# Altium PCB PCB.PcbDoc
Units mm, origin at the board's own origin, x right, y up, seen from the top; angles counter-clockwise.
Board outline 142.25 x 141.65 mm, 2 copper layers (Top Layer, Bottom Layer); 29 components, 51 nets, 181 pads, 0 vias.
Unrouted connection lines stored in the file: 3.
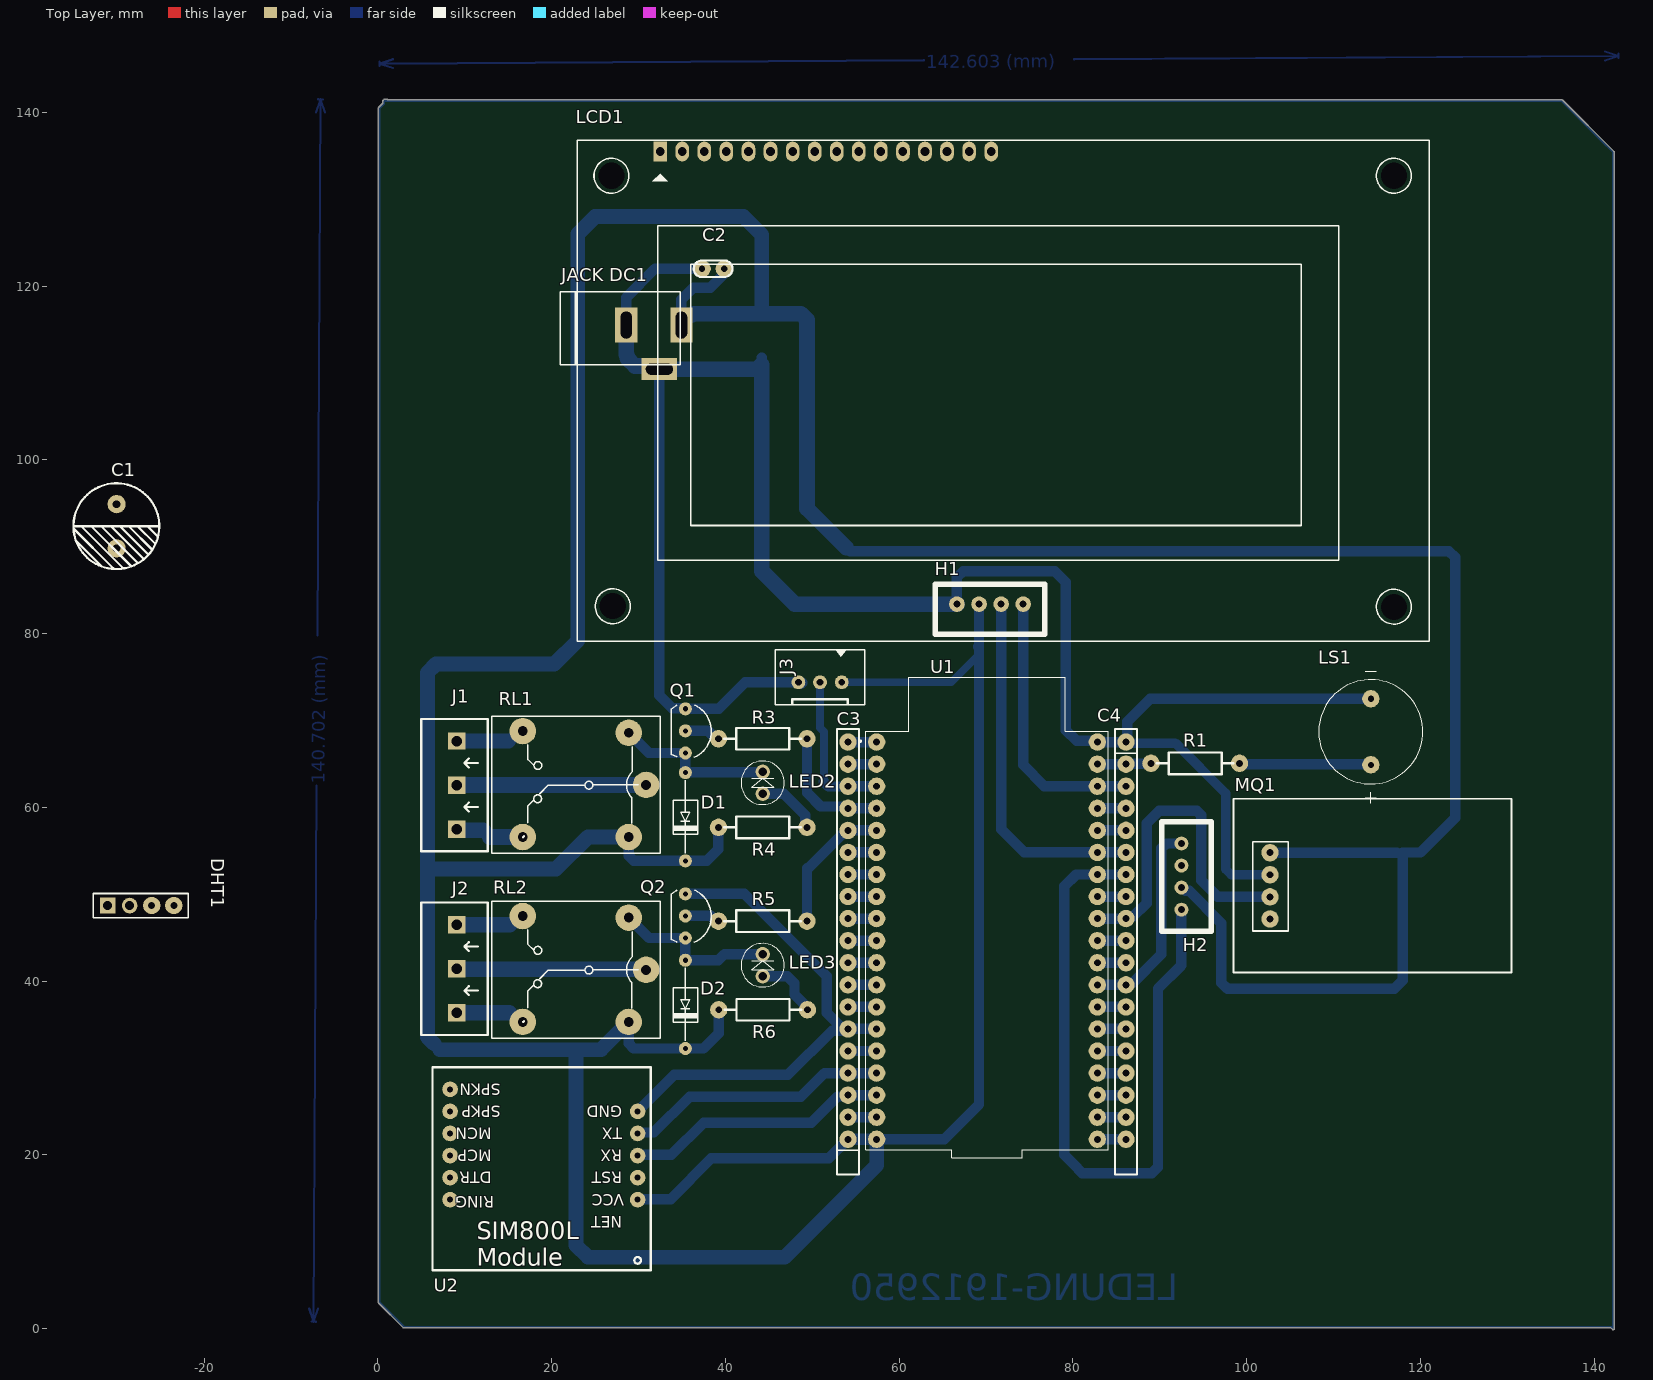
[diagram p0: Top Layer view]
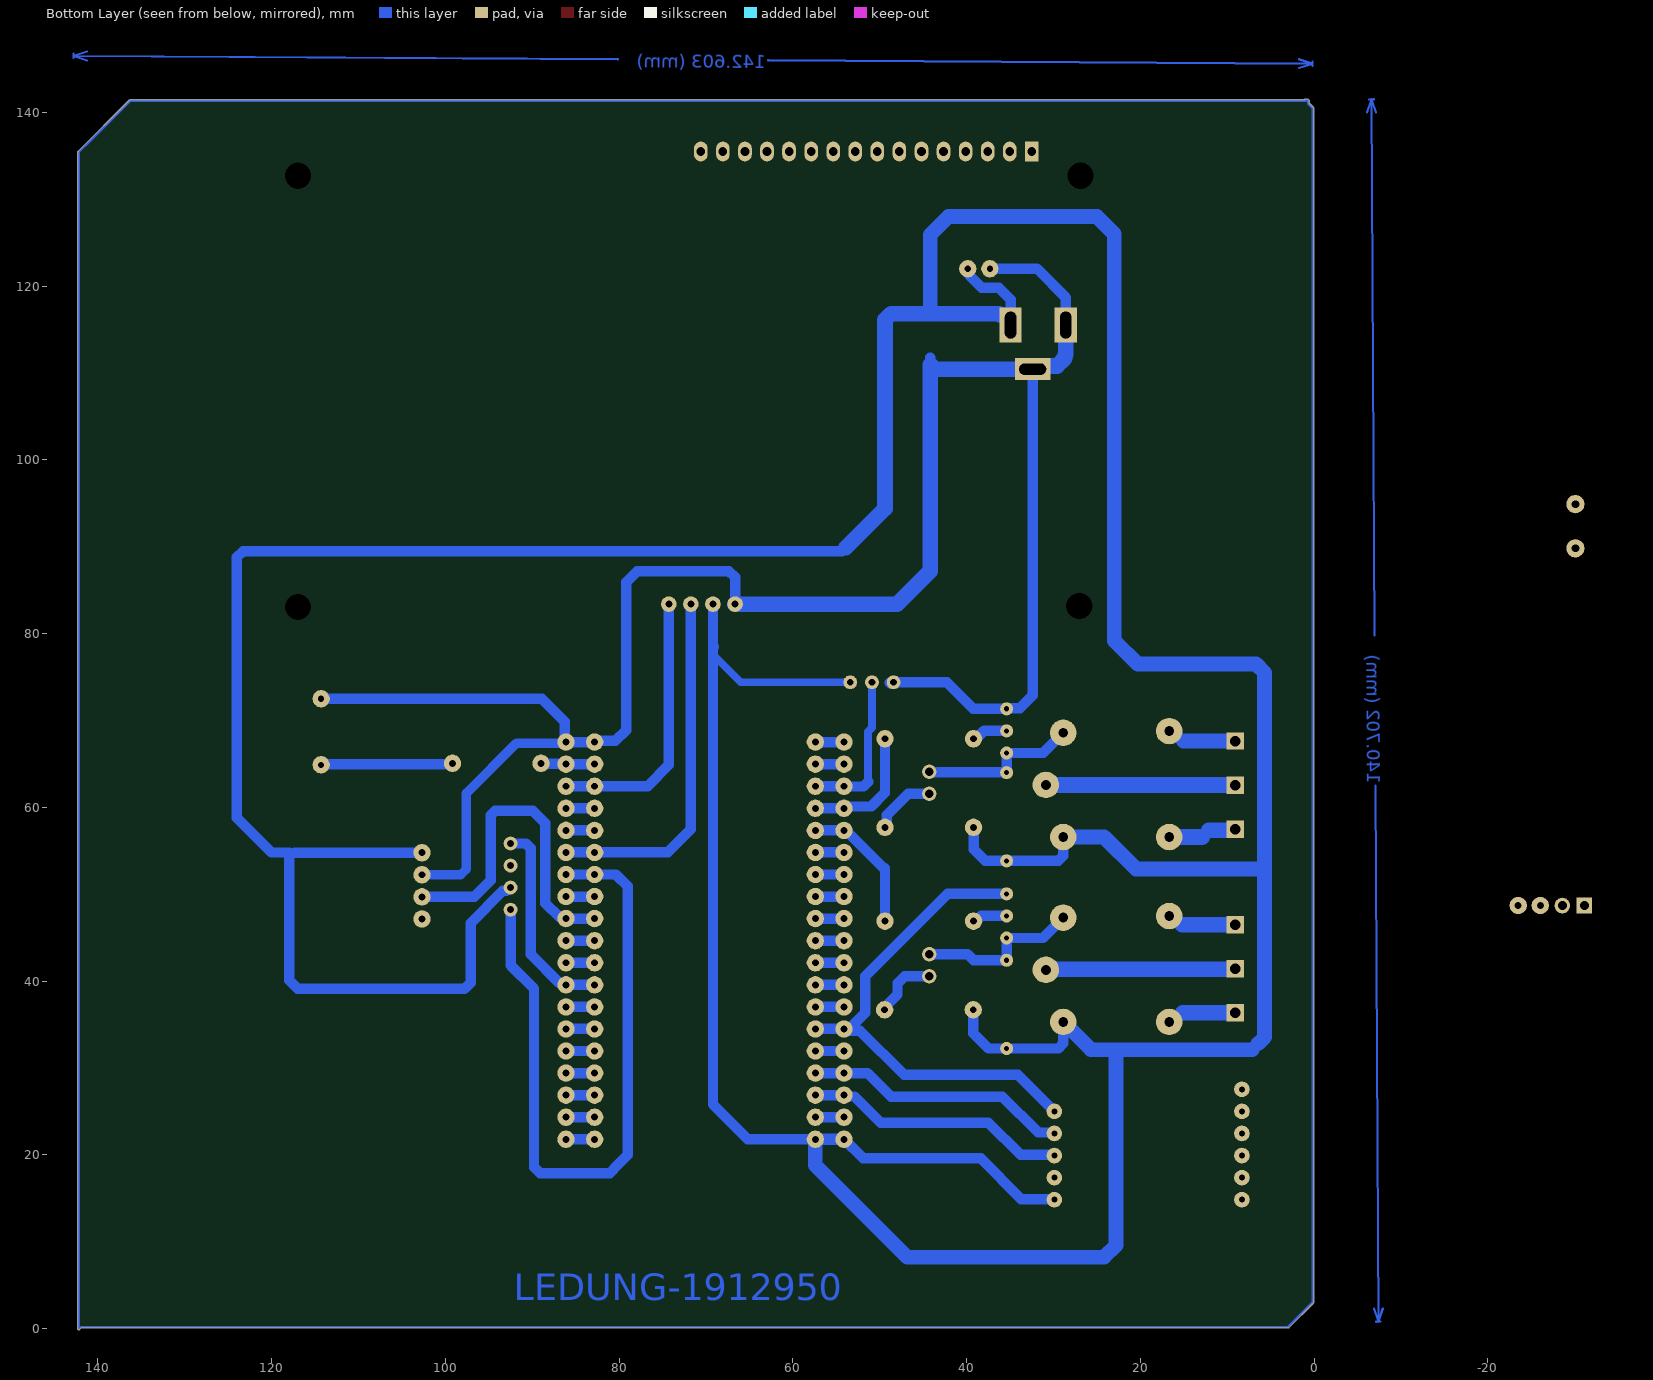
[diagram p1: Bottom Layer view, seen from below]
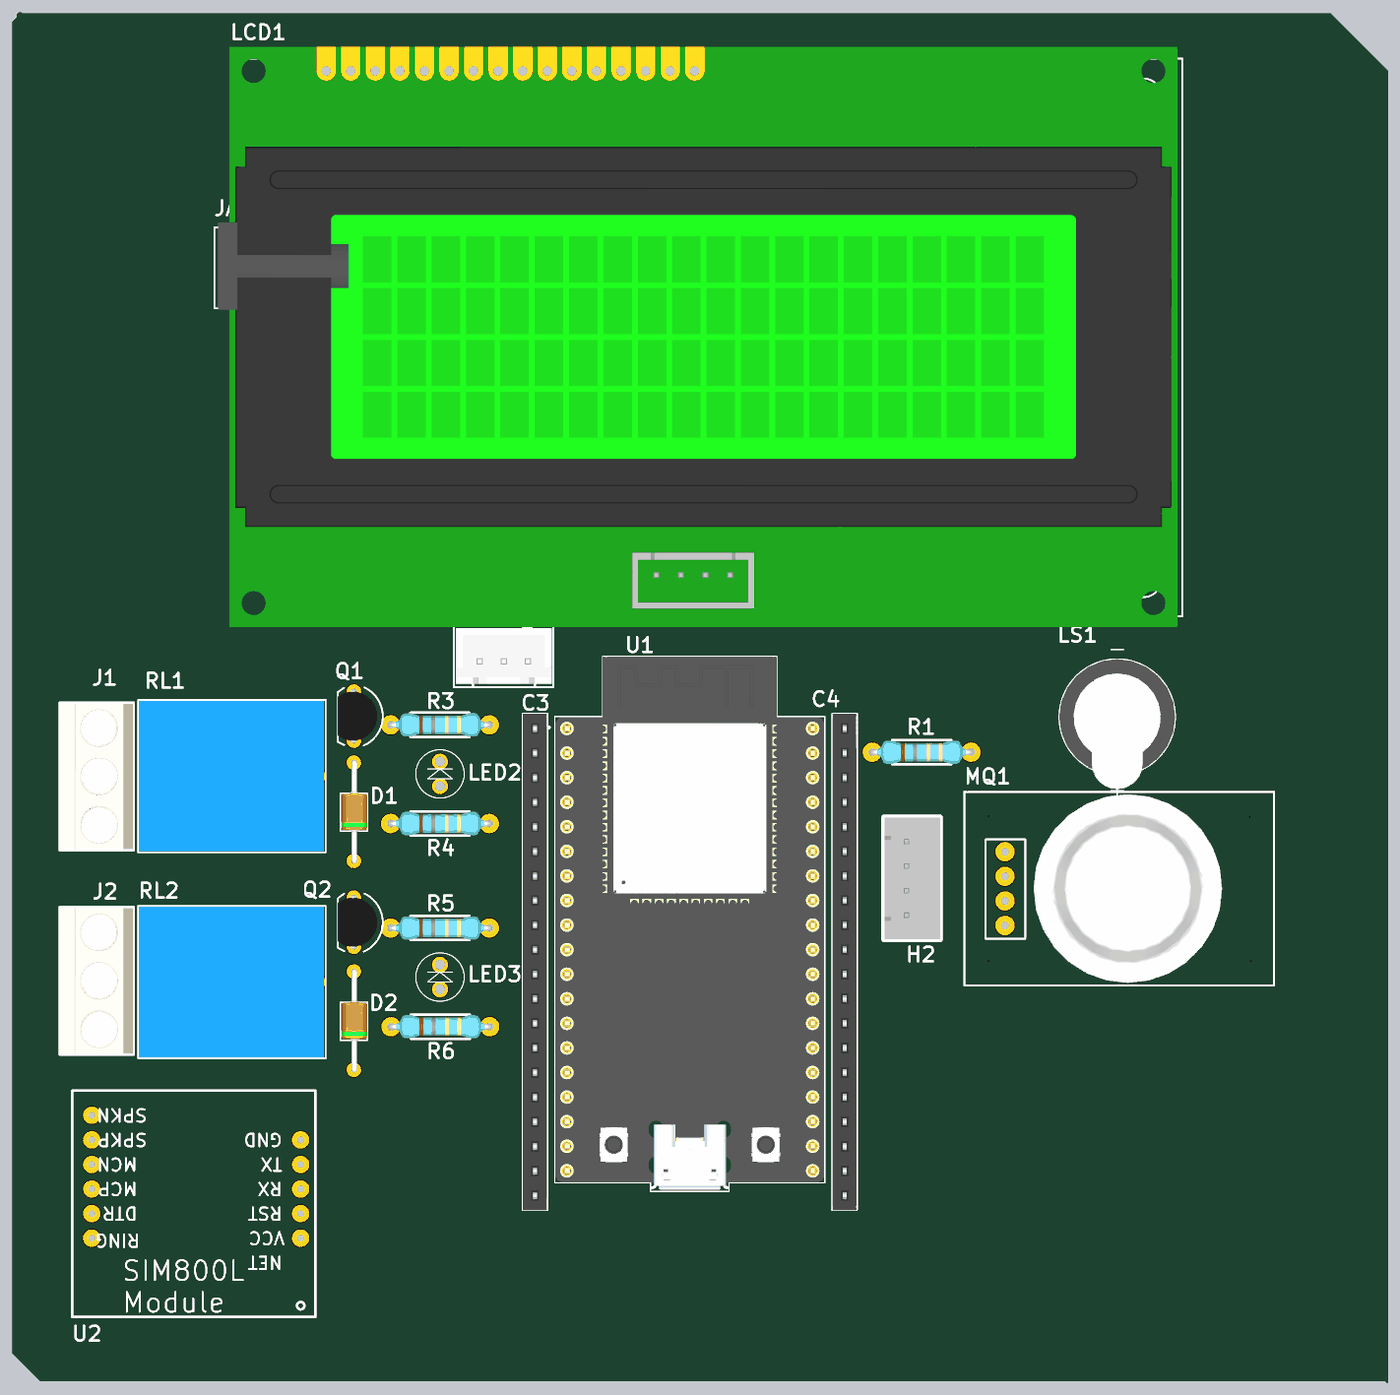
[diagram p2: 3D render of the assembled board from above, using the file's embedded part models]

## Layer stack, top to bottom
Top Solder: solder mask 0.0102, Solder Resist, Dk 3.5
Top Layer: signal copper 0.0356
Dielectric 1: dielectric 0.32, FR-4, Dk 4.8
Bottom Layer: signal copper 0.0356
Bottom Solder: solder mask 0.0102, Solder Resist, Dk 3.5

## Board outline
0.11,2.91 cw(c0.2,3) 0.073,3 0.073,140.5 cw(c0.2,140.5) 0.11,140.591 0.573,141.053 0.573,141.3 cw(c0.7,141.3) 0.61,141.391 0.71,141.49 cw(c0.8,141.401) 0.8,141.527 1,141.527 cw(c1,141.4) 1.124,141.427 136.3,141.427 cw(c136.3,141.3) 136.39,141.39 142.29,135.49 cw(c142.201,135.4) 142.327,135.4 142.327,0 cw(c142.2,0) 142.109,-0.09 141.947,0.073 3,0.073 cw(c3,0.2) 2.909,0.11

## Design rules (kind name [scope] priority, off if disabled: settings)
Clearance [All] p1: gap=0.5 ignorepadtopadclearanceinfootprint=FALSE
PolygonConnect [All] p1: connectstyle=Relief reliefconductorwidth=0.254 reliefentries=4 polygonreliefangle="90 Angle" airgapwidth=0.254
RoutingVias [All] p1: holewidth=0.8 width=2 viastyle="Through Hole" minholewidth=0.6 minwidth=1.5 maxholewidth=1.5 maxwidth=2.5
SolderMaskExpansion [All] p1: expansion=0.102 istentingtop=FALSE
Width [All] p1: maxlimit=1.8 minlimit=0.9 preferedwidth=1.2
30 further rules are at their usual default settings.

## Components (designator, comment, footprint, x,y, rotation, side; value= is the part's Value field where it differs from the comment)
C1 "1000uF" "tu hoa 10mm" -30.073,92.36 r270 top
C2 "104" "tu gom" 38.6,122 r0 top
C3 "JP20" JP20-C1T#1 54.118,19.252 r90 top
C4 "JP20" JP20-C1T#2 86.122,67.512 r270 top
D1 "Diode" DIO-1A 35.4,64 r270 top value=1N5007
D2 "Diode" DIO-1A 35.4,42.4 r270 top value=1N5007
DHT1 "DHT22" DHT22 -27.301,48.7 r0 top
H1 "Header 4P 2.54" XH2.54M-4#1 74.28,83.4 r180 top
H2 "Header 4P 2.54 Duc Thang" XH2.54M-4#2 92.5,55.84 r270 top
J1 "KF3" KF3-5.08 9.06,57.487 r90 top
J2 "KF3" KF3-5.08 9.06,36.353 r90 top
J3 "" CON3_100_B3B-XH-A_TH_ST 46,77.9 r270 top
"JACK DC1" "JACK DC 5.5" "JACK DC 5.5" 31.766,112.978 r0 top value="Jac DC"
LCD1 "LCD 20x4" LCD20X4A 32.5,135.5 r0 top value="LCD 20x4A"
LED2 "LED" LED-5MM-RED 44.3,61.56 r90 top value="LED 3 ly Single Colour"
LED3 "LED" LED-5MM-RED 44.3,40.56 r90 top value="LED 3 ly Single Colour"
LS1 "AI-1223-TWT-5V-R" XDCR_AI-1223-TWT-5V-R 114.3,68.7 r180 top
MQ1 "MQ-135" MQ-135 100.8,58.38 r0 top
Q1 "2N3904" TO92-123 35.4,68.8 r270 top value=C1815
Q2 "2N3904" TO92-123 35.4,47.5 r270 top value=C1815
R1 "100" "tro vach 1/4w" 94.088,65.072 r180 top
R3 "4.7K" "tro vach 1/4w" 44.3,67.9 r180 top
R4 "330" "tro vach 1/4w" 44.3,57.7 r180 top
R5 "4.7K" "tro vach 1/4w" 44.3,46.9 r180 top
R6 "330" "tro vach 1/4w" 44.339,36.7 r180 top
RL1 "Relay" "Relay 5 Chan SRD" 30.88,62.585 r180 top
RL2 "Relay" "Relay 5 Chan SRD" 30.88,41.3 r180 top
U1 "ESP32-DEVKITC" MODULE_ESP32-DEVKITC 70.12,44.662 r0 top
U2 "SIM800L" "SIM800L MODULE" 29.9,25 r180 top

## Footprints (in the part's own frame and the unit in brackets; to place one, negate y for a bottom-side part, rotate by r counter-clockwise, add the part's x,y. Pads: shape width x height; smd on the part's side, far side on the other; paste and mask are expansions set on the pad)
CON3_100_B3B-XH-A_TH_ST [mm] "Connector Header"
  round 1.6 hole 0.8: 1(3.5,7.4) 2(3.5,4.9) 3(3.5,2.4)
  silkscreen extent -0.25,-0.25 6.1,10.03, body extent 0.02,-0.05 5.78,9.85, height 7.01
DHT22 [mm]
  rect 1.8x1.8 hole 1.02: 1(-3.81,0)
  round 1.8 hole 1.02: 2(-1.27,0)
  round 2 hole 0.8: 3(1.27,0) 4(3.81,0)
  silkscreen extent -5.46,-1.4 5.46,1.4, body extent -7.86,-5.84 7.61,2.31, height 35.57
DIO-1A [mm]
  round 1.5 hole 0.6: 1(0,0) 2(10.16,0)
  silkscreen extent 0.89,-1.4 9.27,1.4, body extent -0.28,-1.27 10.44,1.38, height 2.6
"JACK DC 5.5" [mm] "Jac DC input"
  rect 2.54x4.064 hole 1.3 slot 3.1 at 90 deg: 1(3.175,2.54) 2(-3.175,2.54)
  rect 4.064x2.54 hole 1.3 slot 3.1 at 0 deg: 3(0.635,-2.54)
  silkscreen extent -10.79,-2.03 3.05,6.35, body extent -10.42,-2.67 3.4,6.84, height 11.02
JP20-C1T#1 [mm] "20 row, straight, gold plating"
  round 0 all layers, no hole: 1(0,0)
  round 2 hole 0.8: 2(2.54,0) 3(5.08,0) 4(7.62,0) 5(10.16,0) 6(12.7,0) 7(15.24,0) 8(17.78,0) 9(20.32,0) 10(22.86,0) 11(25.4,0) 12(27.94,0) 13(30.48,0) 14(33.02,0) 15(35.56,0) 16(38.1,0) 17(40.64,0) 18(43.18,0) 19(45.72,0) 20(48.26,0)
  silkscreen extent -1.52,-1.27 49.78,1.27, body extent -1.52,-1.25 49.78,1.25, height 8.51
JP20-C1T#2 [mm] "20 row, straight, gold plating"
  round 2 hole 0.8: 1(0,0) 2(2.54,0) 3(5.08,0) 4(7.62,0) 5(10.16,0) 6(12.7,0) 7(15.24,0) 8(17.78,0) 9(20.32,0) 10(22.86,0) 11(25.4,0) 12(27.94,0) 13(30.48,0) 14(33.02,0) 15(35.56,0) 16(38.1,0) 17(40.64,0) 18(43.18,0) 19(45.72,0)
  round 0 all layers, no hole: 20(48.26,0)
  silkscreen extent -1.52,-1.27 49.78,1.27, body extent -1.52,-1.25 49.78,1.25, height 8.51
KF3-5.08 [mm]
  rect 2x2 hole 1.2: 1(0,0) 2(5.08,0) 3(10.147,0)
  silkscreen extent -2.54,-3.58 12.7,4.06, body extent -2.42,-3.51 12.58,3.99, height 10
LCD20X4A [mil] "LCD dipslay 20x4, 16 pin"
  rect 62x90 hole 39: 1(0,0)
  oval 62x90 hole 39: 2(100,0) 3(200,0) 4(300,0) 5(400,0) 6(500,0) 7(600,0) 8(700,0) 9(800,0) 10(900,0) 11(1000,0) 12(1100,0) 13(1200,0) 14(1300,0) 15(1400,0) 16(1500,0)
  round 102.36 hole 118.11: "Hole 0"(-220,-110) "Hole 0"(-215,-2060) "Hole 0"(3325,-2065) "Hole 0"(3325,-110)
  silkscreen extent -375,-2220 3485,50, body extent -392,-2264 3466,98, height 417
LED-5MM-RED [mil]
  round 65 hole 40: 1(0,0) 2(100,0)
  silkscreen extent -48,-98 148,98, body extent -54,-105 155,105, height 370
MODULE_ESP32-DEVKITC [mm]
  round 2 hole 0.8: 1(-12.7,22.85) 2(-12.7,20.31) 3(-12.7,17.77) 4(-12.7,15.23) 5(-12.7,12.69) 6(-12.7,10.15) 7(-12.7,7.61) 8(-12.7,5.07) 9(-12.7,2.53) 10(-12.7,-0.01) 11(-12.7,-2.55) 12(-12.7,-5.09) 13(-12.7,-7.63) 14(-12.7,-10.17) 15(-12.7,-12.71) 16(-12.7,-15.25) 17(-12.7,-17.79) 18(-12.7,-20.33) 19(-12.7,-22.87) 20(12.7,-22.87) 21(12.7,-20.33) 22(12.7,-17.79) 23(12.7,-15.25) 24(12.7,-12.71) 25(12.7,-10.17) 26(12.7,-7.63) 27(12.7,-5.09) 28(12.7,-2.55) 29(12.7,-0.01) 30(12.7,2.53) 31(12.7,5.07) 32(12.7,7.61) 33(12.7,10.15) 34(12.7,12.69) 35(12.7,15.23) 36(12.7,17.77) 37(12.7,20.31) 38(12.7,22.85)
  silkscreen extent -14.67,-25 13.95,30.3, body extent -13.97,-24.8 13.97,30.3, height 3.25
MQ-135 [mm]
  round 0 all layers, no hole: 0(0.2,-14.9) 0(0.2,0.1) 0(27.2,0) 0(27.3,-14.9)
  round 2 hole 0.8: 1(1.9,-3.6) 2(1.9,-6.14) 3(1.9,-8.68) 4(1.9,-11.22)
  silkscreen extent -2.3,-17.4 29.7,2.6, body extent 4.85,-17.15 24.35,2.35, height 14
"Relay 5 Chan SRD" [mil] "Relay SPDT, 5 pin, 10A,W 650mil, L 800mil, H 800mil"
  round 120 hole 45: 1(0,0) 2(559.06,236.22) 3(559.06,-243.78) 4(78.74,-236.22) 5(78.74,236.22)
  silkscreen extent -63,-311 700,310, body extent -55,-306 697,304, height 602
"SIM800L MODULE" [mm]
  round 1.8 hole 0.7: 1(0,10.16) 2(0,7.62) 3(0,5.08) 4(0,2.54) 5(0,0) 6(21.59,10.16) 7(21.59,7.62) 8(21.59,5.08) 9(21.59,2.54) 10(21.59,0) 11(21.59,-2.54)
  silkscreen extent -1.52,-5.08 23.62,18.29
TO92-123 [mm] "TO-92"
  round 1.5 hole 0.6: 1(-2.54,0) 2(0,0) 3(2.54,0)
  silkscreen extent -2.96,-1.65 3.05,2.99, body extent -2.77,-1.67 2.77,2.41, height 6.22
"tro vach 1/4w" [mm]
  round 2 hole 0.8: 1(-5.1,0) 2(5.1,0)
  silkscreen extent -4.39,-1.25 4.42,1.25, body extent -5.38,-1.2 5.38,1.2, height 2.41
"tu gom" [mm] "Tu gom mini"
  round 2 hole 0.7: 1(-1.27,0) 2(1.27,0)
  silkscreen extent -2.25,-0.97 2.22,0.97, body extent -2.92,-0.85 2.92,0.85, height 6.12
"tu hoa 10mm" [mm]
  round 2.1 hole 0.9: 1(-2.54,0) 2(2.54,0)
  silkscreen extent -4.95,-4.96 4.93,4.92, body extent -5,-5 4.97,5, height 20.01
XDCR_AI-1223-TWT-5V-R [mm]
  round 2 hole 0.7: N(0,-3.8) P(0,3.8)
  silkscreen extent -6,-6.98 6,8.25, body extent -6,-6 6,7.44, height 9.7
XH2.54M-4#1 [mm]
  round 1.8 hole 0.8: 1(0,0) 2(2.54,0) 3(5.08,0) 4(7.62,0)
  silkscreen extent -2.48,-2.26 10.1,3.46, body extent -2.48,-2.26 10.1,3.48, height 6.91
XH2.54M-4#2 [mm]
  round 1.6 hole 0.8: 1(0,0) 2(2.54,0) 3(5.08,0) 4(7.62,0)
  silkscreen extent -2.48,-2.26 10.1,3.46, body extent -2.48,-2.26 10.1,3.48, height 6.91

## Part data
C1: library part "Tu Hoa 1000uF 10V 10x12", "Cắm", Chung_Loai=Cắm, Don_Vi=Con, Ma_Hang=MH006614, So_Chan=2, Ten_Linh_Kien="Tụ Hóa 1000uF 10V 10x12MM"
C2: library part "Tu gom 104 50V", "Cắm", Chung_Loai=Cắm, Don_Vi=Con, Ma_Hang=MH004761, So_Chan=2, Ten_Linh_Kien="Tụ gốm 104 100nF 50V"
C3 C4: "WR-PHD 2.54 mm Angled Socket Header", Manufacturer="W¨¹rth Elektronik eiSos GmbH", partNo=613020143121, ComponentLink1 Description=Manufacturer, ComponentLink1URL=http://www.we-online.com, ComponentLink2 Description=Datasheet, ComponentLink2URL=http://katalog.we-online.de/em/datasheet/6130xx143121.pdf, Created by="Karrer Zheng", Created Date="29 March 2013", NoPins=20
D1 D2: "Default Diode", Code - JEDEC=DO-214-AB, Published=8-Jun-2000, Publisher="Altium Limited", Revision="July-2002: Re-released for DXP Platform."
DHT1: Manufacturer="W¨¹rth Elektronik eiSos GmbH", partNo=613004143121, ComponentLink1 Description=Manufacturer, ComponentLink1URL=http://www.we-online.com, ComponentLink2 Description=Datasheet, ComponentLink2URL=http://katalog.we-online.de/em/datasheet/6130xx143121.pdf, Created by="Karrer Zheng", Created Date="29 March 2013", NoPins=04
H1: library part "Header 4P 2.54 Duc Thang", "Cắm", Chung_Loai=Cắm, Don_Vi=Con, Ma_Hang=MH001285, Ten_Linh_Kien="Header 4P XH2.54-4P Đực Thẳng"
H2: "Cắm", Chung_Loai=Cắm, Don_Vi=Con, Ma_Hang=MH001285, Ten_Linh_Kien="Header 4P XH2.54-4P Đực Thẳng"
J1 J2: Manufacturer="Würth Elektronik eiSos GmbH", partNo=691103110003, ComponentLink1 Description=Manufacturer, ComponentLink1URL=http://www.we-online.com, ComponentLink2 Description=Datasheet, ComponentLink2URL=http://katalog.we-online.de/em/datasheet/6911031100xx.pdf, Created by="Karrer Zheng", Created Date="29 October 2013", NoPins=3
J3: library part CON-PLG_3X1-100-ST-TH, "3 Pins, 1 Row 2.54mm Pitch, straight Connector, male", Alternate Part Number-1=NA, Case/Package=TH-CON, Crimp Part Number=ASXHSXH22K51, Manufacturer=CUI, Manufacturer Part Number=B3B-XH-A(LF)(SN), Mating Part Number=XHP-3, Supplier Part Number-1=B3B-XH-A(LF)(SN), Supplier-1=ARROW
LCD1: library part LCD20x4A, "LCD dipslay 20 char, 4 line"
LED2 LED3: "LED Single colour Green and Red"
LS1 U1: Package=None, Availability=Unavailable, Price=None
  LS1: MF="{'manufacturer': u'PUI Audio,'}", MP=AI-1223-TWT-5V-R
  U1: MF="{'manufacturer': u'Olimex LTD'}", MP=ESP32-DEVKITC
MQ1: "size: 32x20mm", WEB=TECHMT.VN
Q1 Q2: library part 2N904, "NPN 600mW, ECB"
R1 R3 R4 R5 R6: library part "Tro Vach 1/4W 1% 10k", "Cắm", Chung_Loai=Cắm, Don_Vi=Con, Ma_Hang=MH006349, So_Chan=2, Ten_Linh_Kien="Trở Vạch 1/4w 1% 10k"
RL1 RL2: library part "Relay 5 Chan SRD", "Relay 5 Chan", Ma_Hang=MH009374, Ten="Relay 5V10A SRD-05VDC-SL-C Chính Hãng"
U2: BOM_Supplier=Amazon, BOM_Supplier Part=B01DLIJM2E, Contributor=trigui, sourceId=ega4lDVPJ, spicePre=U, timeStamp=1475502242

## Nets (pads, with @x,y where several pads share a name; then routed paths per layer and width w, separated by ;. In a path a pad name is that pad's centre, name@x,y a point inside that pad or via, vN(x,y) a via of type N, cw(c..) or ccw(c..) an arc to the next point about the centre after c; other vN are vias at no path point)
5V: "JACK DC1.1" C1.1 C2.2 C3.2 D1.2 D2.2 H1.3 H2.3 J3.1 MQ1.1 R4.2 R6.2 RL1.5 RL2.5 U1.19 U2.1 | length 629.6
  Bottom Layer w0.9: J3.1 66,74.4 69,77.4 69.2,77.4
  Bottom Layer w1.2: 6.45,32.803 7.153,32.1 ; RL2.5 28.88,32.827 29.467,32.24 D2.2 37.473,32.24 39.239,34.007 R6.2 ; RL1.5 28.88,54.427 29.467,53.84 D1.2 37.873,53.84 39.2,55.167 R4.2 ; U2.1 29.96,14.9 33.7,14.9 38.4,19.6 51.926,19.6 C3.2 ; 34.941,115.518 34.941,116.28 34.941,118.441 36.29,119.79 38.245,119.79 39.66,121.204 39.66,121.79 C2.2 ; 53.9,89.9 54,89.9 54.4,89.5 123.297,89.5 124,88.797 124,58.8 120,54.8 118,54.8 118,40.1 117,39.1 97.803,39.1 97.1,39.803 97.1,46.675 93.395,50.38 92.988,50.38 92.608,50.76 H2.3 ; U1.19 65.192,21.792 69.2,25.8 69.2,77.4 69.2,78.5 ; 69.1,78.5 69.2,78.5 ; H1.3 69.2,78.5 ; MQ1.1 117.297,54.78
  Bottom Layer w1.3: C3.2 U1.19
  Bottom Layer w1.7: 6.45,32.803 5.7,33.553 5.7,75.504 6.696,76.5 20.3,76.5 23,79.2 23,126 25,128 42.1,128 44.2,125.9 44.2,116.84 ; 6.45,52.9 20.5,52.9 24.185,56.585 RL1.5 ; 7.153,32.1 22.8,32.1 ; RL2.5 25.68,32.1 22.8,32.1 ; U1.19 57.42,18.803 46.817,8.2 24.2,8.2 22.8,9.6 22.8,32.1
  Bottom Layer w1.8: 34.941,116.28 35.311,116.65 36.073,116.65 36.263,116.84 44.2,116.84 48.697,116.84 49.4,116.137 49.4,94.4 53.9,89.9
BUZ: C4.2 R1.2 U1.37 | length 6.2
  Bottom Layer w1.2: U1.37 C4.2 86.172,65.022 88.938,65.022 R1.2
DHT: C3.18 J3.2 U1.3 | length 18
  Bottom Layer w0.9: J3.2 50.9,69.158 51.35,68.708 51.35,62.927
  Bottom Layer w1.2: 51.35,62.927 51.877,62.4 54.086,62.4 C3.18 U1.3
DMQ135: C4.9 MQ1.3 U1.30 | length 38.9
  Bottom Layer w1.2: U1.30 C4.9 86.332,47.403 86.918,47.403 88.5,48.985 88.5,58.173 89.927,59.6 94.273,59.6 94.8,59.073 94.8,51.6 96.7,49.7 MQ1.3
GND: "JACK DC1.2" "JACK DC1.3" C1.2 C2.1 C4.1 H1.4 J3.3 LS1.N MQ1.2 Q1.1 U1.38 | length 238.1
  Bottom Layer w1.1: C4.1@86.234,67.4 91.8,67.4 97.6,61.6 97.6,52.88 98.24,52.24 MQ1.2
  Bottom Layer w1.2: 28.591,115.518 28.591,118.691 31.9,122 C2.1 ; 32.401,110.438 32.401,72.903 33.907,71.397 35.343,71.397 Q1.1 39.24,71.34 42.3,74.4 J3.3 ; 44.2,110.954 44.2,111.76 ; J3.3@48.7,74.2 J3.3@48.834,74.334 ; H1.4 66.66,86.497 67.363,87.2 77.9,87.2 79.2,85.9 79.2,68.9 80.435,67.665 82.667,67.665 U1.38 C4.1 ; C4.1@86.234,67.4 C4.1 ; LS1.N 88.9,72.5 86.262,69.862 86.262,67.653 C4.1
  Bottom Layer w1.8: 28.591,115.518 28.6,115.509 28.6,112.1 28.7,112 28.7,111.7 29.592,110.808 32.031,110.808 32.401,110.438 43.684,110.438 44.2,110.954 44.2,87.2 48,83.4 H1.4
NC1: C3.7 Q2.1 U1.14 U2.5 | length 59.1
  Bottom Layer w1.2: U2.5 34.1,29.2 47.2,29.2 52.282,34.282 53.908,34.282 C3.7 ; Q2.1 42.16,50.04 51.649,40.551 51.649,36.375 53.322,34.702 53.908,34.702 C3.7 ; U1.14 C3.7
NC2: C4.7 H2.4 U1.32 | length 81.7
  Bottom Layer w1.2: C4.7@86.332,52.483 C4.7 U1.32 80.372,52.272 79,50.9 79,20 80.05,18.95 81.1,17.9 83.889,17.9 83.897,17.892 89.097,17.892 89.8,18.595 89.8,39.097 92.5,41.797 H2.4 H2.4@92.423,48.143
NetC3_3: C3.3 U1.18 | length 3.3
  Bottom Layer w1.2: C3.3 U1.18
NetC3_6: C3.6 U1.15 | length 3.3
  Bottom Layer w1.2: C3.6 U1.15
NetC3_8: C3.8 U1.13 | length 3.3
  Bottom Layer w1.2: C3.8 U1.13
NetC3_9: C3.9 U1.12 | length 3.3
  Bottom Layer w1.2: C3.9 U1.12
NetC3_10: C3.10 U1.11 | length 3.3
  Bottom Layer w1.2: C3.10 U1.11
NetC3_11: C3.11 U1.10 | length 3.3
  Bottom Layer w1.2: C3.11 U1.10
NetC3_12: C3.12 U1.9 | length 3.3
  Bottom Layer w1.2: C3.12 U1.9
NetC3_13: C3.13 U1.8 | length 3.3
  Bottom Layer w1.2: C3.13 U1.8
NetC3_14: C3.14 U1.7 | length 3.3
  Bottom Layer w1.2: C3.14 U1.7
NetC3_15: C3.15 U1.6 | length 3.3
  Bottom Layer w1.2: C3.15 U1.6
NetC3_19: C3.19 U1.2 | length 3.3
  Bottom Layer w1.2: C3.19 U1.2
NetC3_20: C3.20 U1.1 | length 3.3
  Bottom Layer w1.2: C3.20 U1.1
NetC4_4: C4.4 U1.35 | length 3.3
  Bottom Layer w1.2: U1.35 C4.4
NetC4_5: C4.5 U1.34 | length 3.3
  Bottom Layer w1.2: U1.34 C4.5
NetC4_8: C4.8 U1.31 | length 3.6
  Bottom Layer w1.2: U1.31 C4.8 C4.8@86.332,49.943
NetC4_10: C4.10 U1.29 | length 3.3
  Bottom Layer w1.2: U1.29 C4.10
NetC4_11: C4.11 U1.28
NetC4_13: C4.13 U1.26 | length 3.3
  Bottom Layer w1.2: U1.26 C4.13
NetC4_14: C4.14 U1.25 | length 3.3
  Bottom Layer w1.2: U1.25 C4.14
NetC4_15: C4.15 U1.24 | length 3.3
  Bottom Layer w1.2: U1.24 C4.15
NetC4_16: C4.16 U1.23 | length 3.3
  Bottom Layer w1.2: U1.23 C4.16
NetC4_17: C4.17 U1.22 | length 3.3
  Bottom Layer w1.2: U1.22 C4.17
NetC4_18: C4.18 U1.21 | length 3.3
  Bottom Layer w1.2: U1.21 C4.18
NetC4_19: C4.19 U1.20 | length 3.3
  Bottom Layer w1.2: U1.20 C4.19
NetD1_1: D1.1 LED2.2 Q1.3 RL1.4 | length 18.7
  Bottom Layer w1.2: RL1.4 31.205,66.26 Q1.3 D1.1 35.45,64.05 44.25,64.05 LED2.2
NetD2_1: D2.1 LED3.2 Q2.3 RL2.4 | length 19.2
  Bottom Layer w1.2: RL2.4 31.22,44.96 Q2.3 D2.1 39.2,42.4 39.9,43.1 LED3.2
NetJ1_1: J1.1 RL1.2 | length 8
  Bottom Layer w1.2: J1.1 J1.1@9.178,57.369 ; 12.11,57.369 12.894,56.585
  Bottom Layer w1.8: J1.1@9.178,57.369 12.11,57.369 ; 12.894,56.585 RL1.2
NetJ1_2: J1.2 RL1.1 | length 21.8
  Bottom Layer w1.2: J1.2 J1.2@9.069,62.576 ; RL1.1@30.871,62.576 RL1.1
  Bottom Layer w1.8: J1.2@9.069,62.576 RL1.1@30.871,62.576
NetJ1_3: J1.3 RL1.3 | length 8.1
  Bottom Layer w1.2: 15.037,67.634 16.18,68.777 RL1.3
  Bottom Layer w1.7: J1.3 15.037,67.634
NetJ2_1: J2.1 RL2.2 | length 8.1
  Bottom Layer w1.2: 15.127,36.353 16.18,35.3 RL2.2
  Bottom Layer w1.8: J2.1 15.127,36.353
NetJ2_2: J2.2 RL2.1 | length 21.9
  Bottom Layer w1.2: J2.2 J2.2@9.126,41.366 ; RL2.1@30.814,41.366 RL2.1
  Bottom Layer w1.8: J2.2@9.126,41.366 RL2.1@30.814,41.366
NetJ2_3: J2.3 RL2.3 | length 8
  Bottom Layer w1.2: 15.188,46.5 16.18,47.492 RL2.3
  Bottom Layer w1.8: J2.3 15.188,46.5
NetLED2_1: LED2.1 R4.1 | length 7.4
  Bottom Layer w1.2: LED2.1 46.74,61.56 49.19,59.11 49.19,57.91 R4.1
NetLED3_1: LED3.1 R6.1 | length 7.7
  Bottom Layer w1.2: LED3.1 47.14,40.56 47.956,39.744 47.956,38.481 49.439,36.998 R6.1
NetLS1_P: LS1.P R1.1 | length 15.3
  Bottom Layer w1.2: R1.1@99.256,65.14 R1.1 99.274,64.986 114.214,64.986 LS1.P
NetQ1_2: Q1.2 R3.2 | length 4.2
  Bottom Layer w1.2: Q1.2 38.002,68.8 38.902,67.9 R3.2
NetQ2_2: Q2.2 R5.2 | length 4
  Bottom Layer w1.2: Q2.2 38.302,47.5 38.902,46.9 R5.2
RL1: C3.17 R3.1 U1.4 | length 15
  Bottom Layer w1.2: R3.1 49.4,61.7 51,60.1 53.91,60.1 C3.17 U1.4
RL2: C3.16 R5.1 U1.5 | length 15.9
  Bottom Layer w1.2: R5.1 49.4,53 49.548,53 53.9,57.352 C3.16 U1.5
RX1: C3.5 U1.16 U2.4 | length 30.4
  Bottom Layer w1.2: U2.4 30.015,22.575 31.775,22.575 35.9,26.7 48.7,26.7 51.412,29.412 C3.5 U1.16
RX2: C4.12 H2.1 U1.27 | length 23.6
  Bottom Layer w1.2: U1.27 C4.12 86.332,39.783 86.918,39.783 90.2,43.065 90.2,55.3 90.74,55.84 H2.1
SCL: C4.3 H1.1 U1.36 | length 31.4
  Bottom Layer w1.2: H1.1 74.28,64.88 76.728,62.432 U1.36 C4.3
SDA: C4.6 H1.2 U1.33 | length 41.4
  Bottom Layer w1.2: H1.2 71.74,57.46 74.388,54.812 U1.33 C4.6
TX1: C3.4 U1.17 U2.3 | length 30.4
  Bottom Layer w1.2: U2.3 29.98,20 33.8,20 37.5,23.7 49.9,23.7 52.919,26.719 53.965,26.719 C3.4 U1.17
pads on no net: "LCD1.Hole 0" C3.1 C4.20 DHT1.1 DHT1.2 DHT1.3 DHT1.4 H2.2 LCD1.1 LCD1.2 LCD1.3 LCD1.4 LCD1.5 LCD1.6 LCD1.7 LCD1.8 LCD1.9 LCD1.10 LCD1.11 LCD1.12 LCD1.13 LCD1.14 LCD1.15 LCD1.16 MQ1.0 MQ1.4 U2.2 U2.6 U2.7 U2.8 U2.9 U2.10 U2.11
copper on no net: | length 828.3
  Bottom Layer w0.254: -7.899,2.327 -7.4,0.8 ; -7.654,0.801 -7.146,0.799 ; -7.117,139.979 -6.6,141.5 ; -7.049,62.491 -7.4,0.8 ; -6.951,79.809 -6.6,141.5 ; -6.883,2.321 -7.4,0.8 ; -6.854,141.501 -6.346,141.499 ; -6.101,139.973 -6.6,141.5 ; 0.198,145.854 0.202,145.346 ; 1,141.4 0.8,141.4 0.7,141.3 ; 1.721,146.118 0.2,145.6 ; 1.727,145.102 0.2,145.6 ; 62.841,145.995 0.2,145.6 ; 80.159,146.105 142.8,146.5 ; 141.273,146.998 142.8,146.5 ; 141.279,145.982 142.8,146.5 ; 142.798,146.754 142.802,146.246 ; 0.7,141.3 0.8,141.3 1,141.3 136.3,141.3 137.775,139.825 140.725,136.875 142.2,135.4 142.2,0 142,0.2 3,0.2 0.2,3 0.2,140.5 0.7,141 0.7,141.3
  Bottom Layer w1.2: 82.82,42.112 86.122,42.112 86.146,42.136

## Other copper
Bottom Layer:
  text "142.603 (mm)" at 63.101,145.083 h1.52 r0.36
  text "140.702 (mm)" at -6.134,62.74 h1.52 r89.67
  text "LEDUNG-1912950" at 92.138,3.266 h3.05

## Text inside footprints (layer, text, board x,y; h text height)
U2: Top Overlay "SIM800L / Module" at 11.358,7.22 h2.03; Top Overlay "GND" at 28.122,25.65 h1.3 r180; Top Overlay "TX" at 28.122,23.11 h1.3 r180; Top Overlay "RX" at 28.122,20.57 h1.3 r180; Top Overlay "RST" at 28.122,18.03 h1.3 r180; Top Overlay "DTR" at 13.136,18.03 h1.3 r180; Top Overlay "MCP" at 13.136,20.57 h1.3 r180; Top Overlay "MCN" at 13.136,23.11 h1.3 r180; Top Overlay "SPKP" at 14.152,25.65 h1.3 r180; Top Overlay "SPKN" at 14.152,28.19 h1.3 r180; Top Overlay "VCC" at 28.376,15.49 h1.3 r180; Top Overlay "NET" at 28.122,12.95 h1.3 r180; Top Overlay "RING" at 13.39,15.236 h1.3 r180